# EAGLE board SO14_SO8_SOT363_SOT23-6 (EAGLE 6.4)
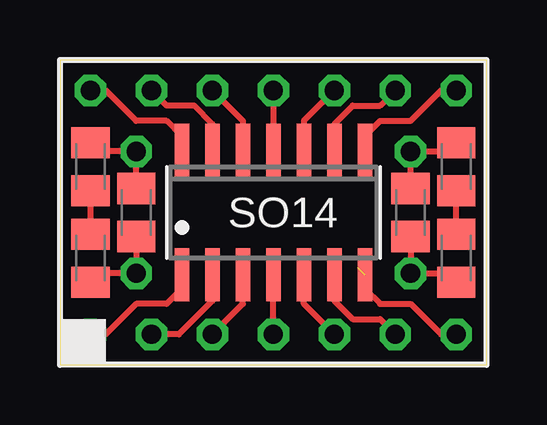
[diagram p0: board, top side]
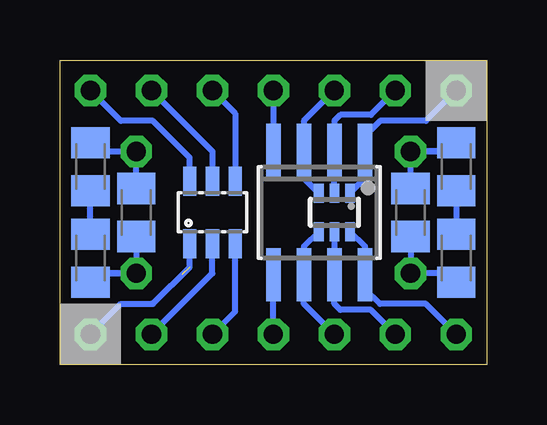
[diagram p1: board, bottom side, seen from below]

Size 17.78 x 12.7 mm. Coordinates in mm from the lower left corner, seen from the top.
Outline: 0,0 17.78,0 17.78,12.7 0,12.7 0,0
Copper layers (1*16): Top 0.035mm / dielectric 1.5mm / Bottom 0.035mm
Design rules "default": minimum track width 10mil, minimum drill 0.6mm, track to track 8mil, track to pad 8mil, pad to pad 8mil, via to via 8mil, smd to smd 8mil, copper to edge 40mil, drill to drill 8mil, minimum pad ring 10mil, minimum via ring 8mil, stop-mask expansion 4mil, vias tented up to drill 0mil, thermal gap 10mil

## Footprints (pad centres in the part's own frame; a part is rotated, then mirrored left to right if it is on the bottom)
SO14 = smd 0.6 x 2.2: 1 -3.81,-2.6; 2 -2.54,-2.6; 3 -1.27,-2.6; 4 0,-2.6; 5 1.27,-2.6; 6 2.54,-2.6; 7 3.81,-2.6; 8 3.81,2.6; 9 2.54,2.6; 10 1.27,2.6; 11 0,2.6; 12 -1.27,2.6; 13 -2.54,2.6; 14 -3.81,2.6
1 = drill 0.8 octagon: P$1 0,0
C0805K = smd 1.3 x 1.6: 1 -1,0; 2 1,0
SO8 = smd 0.6 x 2.2: 1 -1.905,-2.6; 2 -0.635,-2.6; 3 0.635,-2.6; 4 1.905,-2.6; 5 1.905,2.6; 6 0.635,2.6; 7 -0.635,2.6; 8 -1.905,2.6
SOT23-6L = smd 0.55 x 1.2: 1 -0.95,-1.3; 2 0,-1.3; 3 0.95,-1.3; 4 0.95,1.3; 5 0,1.3; 6 -0.95,1.3
SOT363_PHILIPS = smd 0.4 x 0.8: 1 -0.65,-0.8; 2 0,-0.8; 3 0.65,-0.8; 4 0.65,0.8; 5 0,0.8; 6 -0.65,0.8

## Placement (x,y rotation side)
E$32  [SO14]  8.89,6.35 180 top
E$33  [1]  1.27,1.27 0 top
E$34  [1]  3.81,1.27 0 top
E$35  [1]  6.35,1.27 0 top
E$36  [1]  8.89,1.27 0 top
E$37  [1]  11.43,1.27 0 top
E$38  [1]  13.97,1.27 0 top
E$39  [1]  16.51,1.27 0 top
E$40  [1]  1.27,11.43 0 top
E$41  [1]  3.81,11.43 0 top
E$42  [1]  6.35,11.43 0 top
E$43  [1]  8.89,11.43 0 top
E$44  [1]  11.43,11.43 0 top
E$45  [1]  13.97,11.43 0 top
E$46  [1]  16.51,11.43 0 top
E$47  [C0805K]  14.61,6.35 90 top
E$48  [C0805K]  16.51,8.26 90 top
E$49  [SO8]  6.99,6.35 180 bottom
E$50  [SOT23-6L]  11.43,6.35 0 bottom
E$51  [C0805K]  16.51,4.45 90 top
E$52  [C0805K]  16.51,8.26 90 bottom
E$82  [C0805K]  16.51,4.45 90 bottom
E$91  [C0805K]  14.61,6.35 90 bottom
E$573  [C0805K]  3.17,6.35 270 top
E$577  [1]  3.17,3.81 180 top
E$578  [1]  3.17,8.89 180 top
E$579  [1]  14.61,8.89 0 top
E$580  [1]  14.61,3.81 0 top
E$581  [C0805K]  1.27,4.45 270 top
E$582  [C0805K]  1.27,8.26 270 top
E$645  [C0805K]  1.27,4.45 270 bottom
E$646  [C0805K]  1.27,8.26 270 bottom
E$647  [C0805K]  3.17,6.35 270 bottom
E$648  [SOT363_PHILIPS]  6.35,6.35 180 bottom

## Library data of the parts
E$32 E$47-E$52 E$82 E$91 E$573 E$581 E$582 E$645-E$647 = ref-packages
E$33-E$46 E$577-E$580 = drill
E$648 = diode

## Nets
S$25: E$32.8 E$33.P$1 E$49.8 E$648.6
S$27: E$32.10 E$35.P$1 E$49.6 E$648.4
S$28: E$32.11 E$36.P$1 E$49.5
S$29: E$32.12 E$37.P$1 E$50.3
S$30: E$32.13 E$38.P$1 E$50.2
S$31: E$32.14 E$39.P$1 E$50.1
S$32: E$32.7 E$40.P$1 E$49.1 E$648.1
S$34: E$32.5 E$42.P$1 E$49.3 E$648.3
S$35: E$32.4 E$43.P$1 E$49.4
S$36: E$32.3 E$44.P$1 E$50.4
S$37: E$32.2 E$45.P$1 E$50.5
S$38: E$32.1 E$46.P$1 E$50.6
S$39: E$48.1 E$51.2
S$40: E$52.1 E$82.2
S$41: E$47.2 E$48.2 E$52.2 E$91.2 E$579.P$1
S$42: E$573.1 E$578.P$1 E$582.1 E$646.1 E$647.1
S$51: E$32.9 E$34.P$1 E$49.7 E$648.5
S$52: E$32.6 E$41.P$1 E$49.2 E$648.2
S$265: E$581.1 E$582.2
S$318: E$47.1 E$51.1 E$82.1 E$91.1 E$580.P$1
S$319: E$573.2 E$577.P$1 E$581.2 E$645.2 E$647.2
S$320: E$645.1 E$646.2

## Tracks (layer width: path | path; a pad name or v marks a point on that pad's centre or on a via)
S$25
  Top 0.254: E$49.8 5.08,3.17 4.45,2.54 3.17,2.54 1.91,1.27 E$33.P$1
  Bottom 0.254: E$33.P$1 2.54,2.54 4.45,2.54 5.08,3.17 E$49.8 5.08,4.93 E$648.6
S$27
  Top 0.254: E$35.P$1 7.62,2.54 E$49.6
  Bottom 0.254: E$35.P$1 7.62,2.54 E$49.6 7.62,4.93 E$648.4
S$28
  Top 0.254: E$36.P$1 E$49.5
  Bottom 0.254: E$36.P$1 E$49.5
S$29
  Top 0.254: E$37.P$1 10.16,2.54 E$32.12
  Bottom 0.254: E$37.P$1 10.48,2.22 E$50.3
S$30
  Top 0.254: E$32.13 11.43,2.67 12.19,1.91 13.34,1.91 E$38.P$1
  Bottom 0.254: E$38.P$1 11.43,3.81 E$50.2
S$31  (1 unrouted)
  Top 0.254: 12.7,3.17 13.34,2.54 14.61,2.54 15.88,1.27 E$39.P$1
  Bottom 0.254: E$39.P$1 15.24,2.54 13.97,2.54 13.91,2.54 12.38,4.07 E$50.1
S$32
  Top 0.254: E$49.1 5.08,9.53 4.45,10.16 3.17,10.16 1.91,11.43 E$40.P$1
  Bottom 0.254: E$40.P$1 2.54,10.16 4.45,10.16 5.08,9.53 E$49.1 5.08,7.77 E$648.1
S$34
  Top 0.254: E$42.P$1 7.62,10.16 E$49.3
  Bottom 0.254: E$42.P$1 7.62,10.16 E$49.3 7.62,7.77 E$648.3
S$35
  Top 0.254: E$43.P$1 E$49.4
  Bottom 0.254: E$43.P$1 E$49.4
S$36
  Top 0.254: E$44.P$1 10.16,10.16 E$32.3
  Bottom 0.254: E$44.P$1 10.48,10.48 E$50.4
S$37
  Top 0.254: E$32.2 11.43,10.03 12.19,10.79 13.34,10.79 E$45.P$1
  Bottom 0.254: E$45.P$1 11.43,8.89 E$50.5
S$38
  Top 0.254: E$32.1 12.7,9.53 13.34,10.16 14.61,10.16 15.88,11.43 E$46.P$1
  Bottom 0.254: E$50.6 12.38,8.63 13.91,10.16 15.24,10.16 E$46.P$1
S$39
  Top 0.254: E$51.2 E$48.1
S$40
  Bottom 0.254: E$82.2 E$52.1
S$41
  Top 0.254: E$48.2 16.51,8.89 E$579.P$1 E$47.2
  Bottom 0.254: E$47.2 E$579.P$1 16.14,8.89 E$48.2
S$42
  Top 0.254: E$647.1 E$578.P$1 1.64,8.89 E$646.1
  Bottom 0.254: E$647.1 E$578.P$1 | E$578.P$1 1.64,8.89 E$646.1 1,9.26 0.64,8.89 E$578.P$1
S$51
  Top 0.254: E$49.7 6.35,2.67 4.95,1.27 E$34.P$1
  Bottom 0.254: E$34.P$1 4.83,2.29 6.1,2.29 6.35,2.54 E$49.7 E$648.5
S$52
  Top 0.254: E$49.2 6.35,10.03 5.59,10.79 4.45,10.79 E$41.P$1
  Bottom 0.254: E$41.P$1 4.83,10.41 6.1,10.41 6.35,10.16 E$49.2 E$648.2
S$265
  Top 0.254: E$582.2 E$581.1
S$318
  Top 0.254: E$91.1 E$580.P$1 16.14,3.81 E$82.1
  Bottom 0.254: E$91.1 E$580.P$1 | E$580.P$1 16.14,3.81 E$82.1 16.78,3.44 17.14,3.81 E$580.P$1
S$319
  Top 0.254: E$581.2 1.27,3.81 E$577.P$1 E$573.2
  Bottom 0.254: E$573.2 E$577.P$1 1.64,3.81 E$581.2
S$320
  Bottom 0.254: E$646.2 E$645.1

## Text on the board
tPlace: SO14